# Altium PCB PCB1.PcbDoc
Units mm, origin at the board's own origin, x right, y up, seen from the top; angles counter-clockwise.
Board outline 35.1 x 17.5 mm, 2 copper layers (Top Layer, Bottom Layer); 14 components, 9 nets, 55 pads, 36 vias.
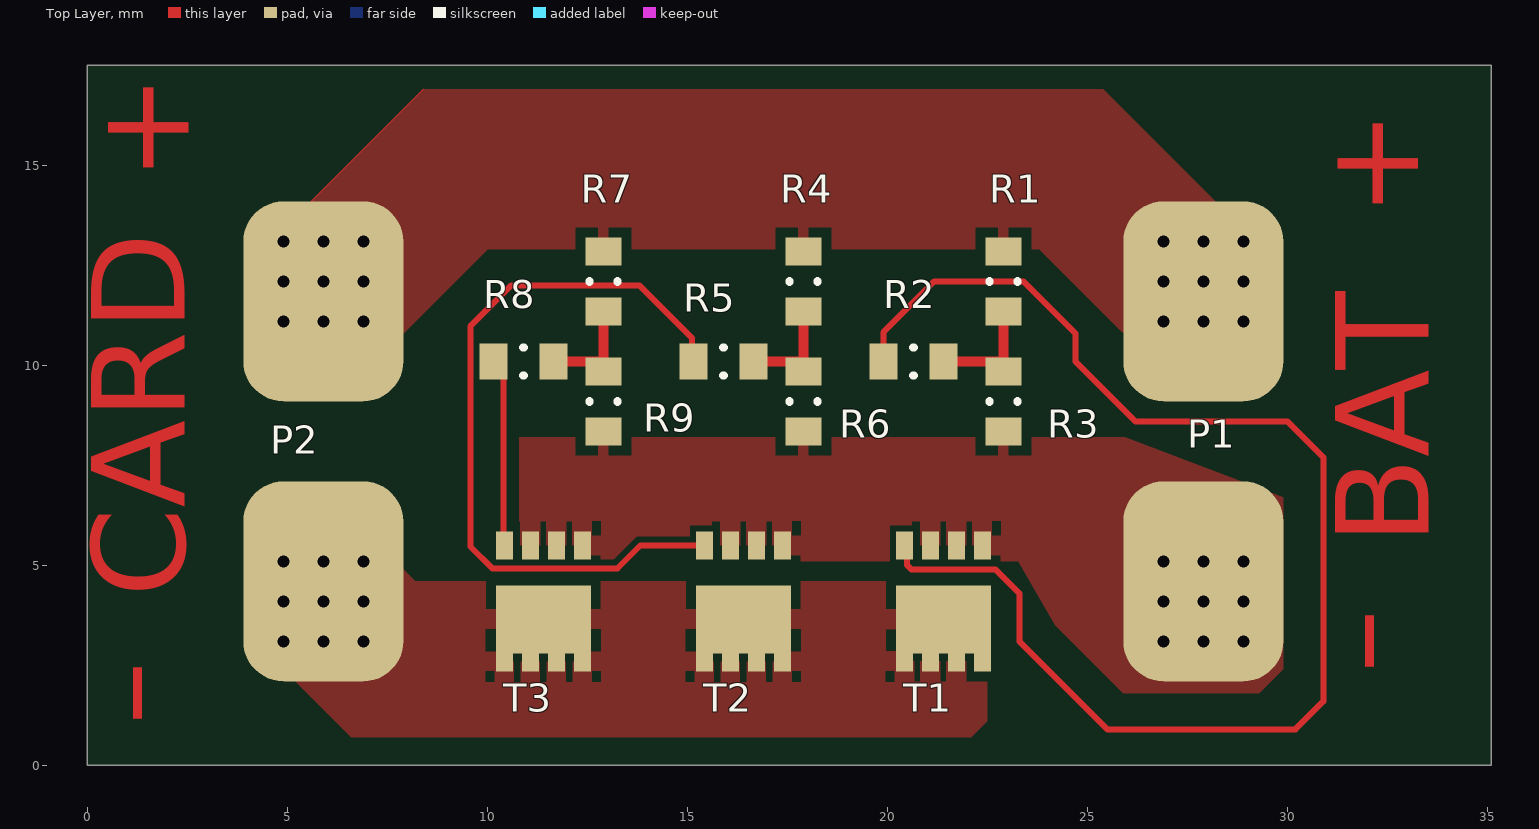
[diagram p0: Top Layer view]
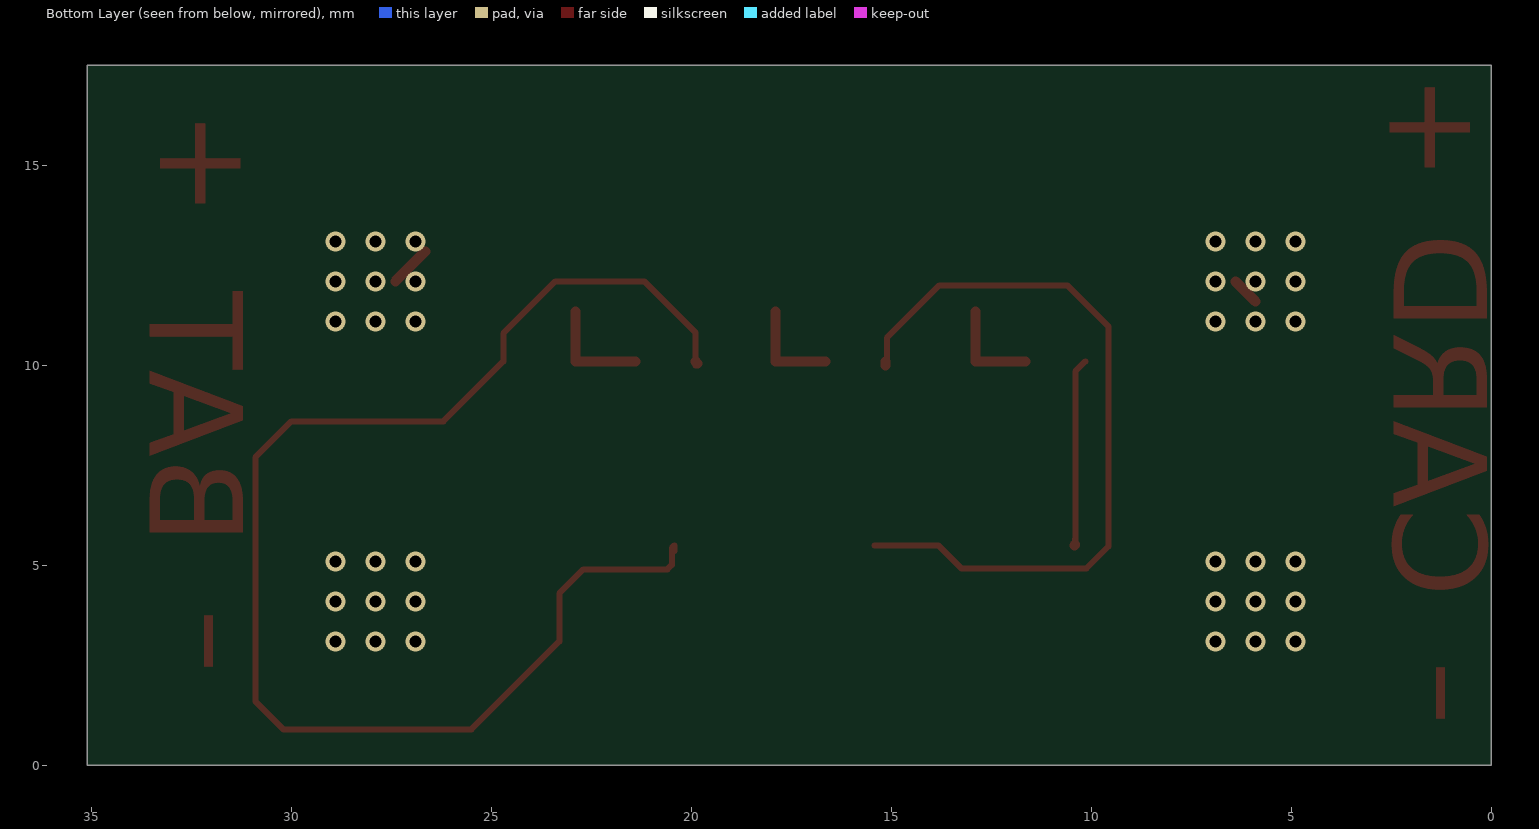
[diagram p1: Bottom Layer view, seen from below]

## Layer stack, top to bottom
Top Solder: solder mask 0.0102, Solder Resist, Dk 3.5
Top Layer: signal copper 0.0356
Dielectric1: dielectric 0.32, FR-4, Dk 4.8
Bottom Layer: signal copper 0.0356
Bottom Solder: solder mask 0.0102, Solder Resist, Dk 3.5

## Board outline
0,0 35.1,0 35.1,17.5 0,17.5

## Design rules (kind name [scope] priority, off if disabled: settings)
AcuteAngle [All] p1 off: minimum=8.80000000000000E+0001 checktracksonly=FALSE
Clearance Clearance_Normal [All] p1: gap=0.15 ignorepadtopadclearanceinfootprint=FALSE except(0: Arc-Hole Track-Hole SMDPad-Hole THPad-Hole Via-Hole Fill-Hole Poly-Hole Region-Hole Text-Hole)
ComponentClearance [All] p1: gap=0.2 collisioncheckmode=3 verticalgap=0.2 showdistances=FALSE
FabricationTestPointUsage TestPointUsage [All] p1: valid=0 allowmultiple=FALSE
FabricationTestpoint Testpoint [All] p1: side=3 testpointundercomponent=TRUE minsize=1.016 maxsize=2.54 preferedsize=1.524 minholesize=0 maxholesize=1.016 preferedholesize=0.813 testpointgrid=0.025 allowsidetop=TRUE allowsidebottom=TRUE usegrid=TRUE gridtolerance=0
Height [All] p1 off: minheight=0 maxheight=25.4 prefheight=12.7
HoleSize [All] p1: absolutevalues=TRUE maxlimit=6 minlimit=0.3 maxpercent=80.000 minpercent=20.000
MinimumAnnularRing [All] p1: minimumring=0.15
MinimumSolderMaskSliver [All] p1: minsoldermaskwidth=0.2
PlaneClearance [All] p1: clearance=0.4
PlaneConnect [All] p1: planeconnectstyle=Relief reliefexpansion=0.508 reliefentries=4 reliefconductorwidth=0.2 reliefairgap=0.254
PolygonConnect PolygonConnect_resistor [InNet('Bat+') Or InNet('Bat-') vs HasFootprint('RESC1608X06L')] p1: connectstyle=Relief reliefconductorwidth=0.254 reliefentries=4 polygonreliefangle="90 Angle" airgapwidth=0.254
PolygonConnect PolygonConnect_transistor [InNet('Bat- Card') Or InNet('Bat-') vs HasFootprint('PQFN8 3.3X3.3')] p2: connectstyle=Relief reliefconductorwidth=0.5 reliefentries=4 polygonreliefangle="90 Angle" airgapwidth=0.254
PolygonConnect PolygonConnect_Via [IsVia] p3: connectstyle=Direct reliefconductorwidth=0.254 reliefentries=4 polygonreliefangle="90 Angle" airgapwidth=0.254
PolygonConnect [All] p4: connectstyle=Direct reliefconductorwidth=0.2 reliefentries=4 polygonreliefangle="90 Angle" airgapwidth=0.254
RoutingCorners [All] p1: cornerstyle=45-Degree minsetback=1 maxsetback=2.54
RoutingVias [All] p1: holewidth=0.3 width=0.6 viastyle="Through Hole" minholewidth=0.3 minwidth=0.6 maxholewidth=1 maxwidth=4
SMDToCorner [All] p1 off: distance=78740
SMDToPlane [All] p1 off: distance=118110
SilkToSilkClearance [All] p1: silktosilkclearance=0.2
SilkToSolderMaskClearance SilkscreenOverComponentPads [IsPad] p1: minsilkscreentomaskgap=0.2 clearancetoexposedcopper=TRUE
SolderMaskExpansion SolderMaskExpansion_Via [isVia] p1: expansion=-5
SolderMaskExpansion [All] p2: expansion=0.05
ViasUnderSMD [All] p1: allowed=FALSE
Width [All] p1: maxlimit=5 minlimit=0.15 preferedwidth=0.2 minimp=50.000000 maximp=50.000000 favimp=50.000000
19 further rules are at their usual default settings.

## Components (designator, comment, footprint, x,y, rotation, side; value= is the part's Value field where it differs from the comment)
P1 "2 power pads" "PowerPads 2 pins" 27.9,4.1 r90 top
P2 "2 power pads" "PowerPads 2 pins" 5.9,12.1 r270 top
R1 "TBD" RESC1608X06L 22.9,12.1 r270 top
R2 "TBD" RESC1608X06L 20.65,10.1 r180 top
R3 "TBD" RESC1608X06L 22.9,9.1 r270 top
R4 "TBD" RESC1608X06L 17.9,12.1 r270 top
R5 "TBD" RESC1608X06L 15.9,10.1 r180 top
R6 "TBD" RESC1608X06L 17.9,9.1 r270 top
R7 "TBD" RESC1608X06L 12.9,12.1 r270 top
R8 "TBD" RESC1608X06L 10.9,10.1 r180 top
R9 "TBD" RESC1608X06L 12.9,9.1 r270 top
T1 "FDMC8010DC" "PQFN8 3.3X3.3" 21.4,4.1 r180 top
T2 "FDMC8010DC" "PQFN8 3.3X3.3" 16.4,4.1 r180 top
T3 "FDMC8010DC" "PQFN8 3.3X3.3" 11.4,4.1 r180 top

## Footprints (in the part's own frame and the unit in brackets; to place one, negate y for a bottom-side part, rotate by r counter-clockwise, add the part's x,y. Pads: shape width x height; smd on the part's side, far side on the other; paste and mask are expansions set on the pad)
"PowerPads 2 pins" [mm]
  rrect50% 5x4 smd paste-10: 1(0.5,0) 2(7.5,0)
"PQFN8 3.3X3.3" [mm]
  rect 0.42x0.7 smd: 1(-0.975,-1.4) 2(-0.325,-1.4) 3(0.325,-1.4) 4(0.975,-1.4)
  rect 0.42x0.5 smd: 5(0.975,1.5) 6(0.325,1.5) 7(-0.325,1.5) 8(-0.975,1.5)
  rect 0.7x1 smd: 9(-0.65,0.45) 9(0.65,0.45)
  rect 2.37x1.7 smd paste-10: 9(0,0.45)
  body extent -1.65,-1.65 1.65,1.65, height 0.8
RESC1608X06L [mm] "Chip Resistor, Body 1.6x0.8mm, IPC High Density, EIA 0603"
  rect 0.7x0.9 smd: 1(-0.75,0) 2(0.75,0)
  silkscreen extent -0.01,-0.35 0.01,0.35, body extent -0.85,-0.48 0.85,0.48, height 0.6

## Part data
P1 P2: "2-Pin", Manufacturer="Generic Components", Class I=Connector, Publisher="Altium Limited", Revision="July-2002: Re-released for DXP Platform."
R1 R2 R3 R4 R5 R6 R7 R8 R9: library part TBD[[/\]]0603[[/\]]1, "Resistor ToDo 0603", Currentie=CHF, DateLastUpdate="2012-11-19 / 14:13:33", Footprint Acort=0603, Preference=1, ROHS=True, Size=0603
T1 T2 T3: Manufacturer="ON Semiconductor / Fairchild", Max Operating Temperature=150°C, Min Operating Temperature=-55°C, Supplier Part Number 1=FDMC8010DCOSCT-ND, Element Configuration=Dual, Manufacturer Part Number=FDMC8010DC, Mount="Surface Mount", Pricing 1="1 = 1,29000, 10 = 1,15600, 100 = 0,90120, 500 = 0,74448, 1000 = 0,58774 (USD)", ROHS=No, Stock 1=36, Supplier 1=Digi-Key, Weight=0.039g

## Via types
v1: diameter 0.5, hole 0.3, Top Layer to Bottom Layer, 36 vias

## Nets (pads, with @x,y where several pads share a name; then routed paths per layer and width w, separated by ;. In a path a pad name is that pad's centre, name@x,y a point inside that pad or via, vN(x,y) a via of type N, cw(c..) or ccw(c..) an arc to the next point about the centre after c; other vN are vias at no path point)
Bat+: P1.2 P2.1 R1.1 R4.1 R7.1 | length 1.8
  Top Layer w0.254: P2.1 P2.1@6.4,12.1 ; P1.2@26.65,12.85 P1.2@27.4,12.1
  other v1: 4.9,11.1 5.9,11.1 6.9,11.1 26.9,11.1 27.9,11.1 28.9,11.1 4.9,12.1 5.9,12.1 6.9,12.1 26.9,12.1 27.9,12.1 28.9,12.1 4.9,13.1 5.9,13.1 6.9,13.1 26.9,13.1 27.9,13.1 28.9,13.1
Bat-: P1.1 R3.2 R6.2 R9.2 T1.1 T1.2 T1.3 T2.1 T2.2 T2.3 T3.1 T3.2 T3.3
  other v1: 26.9,3.1 27.9,3.1 28.9,3.1 26.9,4.1 27.9,4.1 28.9,4.1 26.9,5.1 27.9,5.1 28.9,5.1
"Bat- Card": P2.2 T1.5 T1.6 T1.7 T1.8 T1.9 T2.5 T2.6 T2.7 T2.8 T2.9 T3.5 T3.6 T3.7 T3.8 T3.9
  other v1: 4.9,3.1 5.9,3.1 6.9,3.1 4.9,4.1 5.9,4.1 6.9,4.1 4.9,5.1 5.9,5.1 6.9,5.1
NetR1_2: R1.2 R2.1 R3.1 | length 2.8
  Top Layer w0.254: R2.1 22.9,10.1 R1.2
NetR2_2: R2.2 T1.4 | length 34.5
  Top Layer w0.15: R2.2@19.9,10 R2.2 19.9,10.825 21.175,12.1 23.4,12.1 24.7,10.8 24.7,10.1 26.2,8.6 30,8.6 30.9,7.7 30.9,1.6 30.2,0.9 25.5,0.9 23.3,3.1 23.3,4.3 22.7,4.9 20.6,4.9 20.487,5.013 20.487,5.438 T1.4 T1.4@20.425,5.36
  Top Layer w0.254: R2.2@19.846,10.046 R2.2
NetR4_2: R4.2 R5.1 R6.1 | length 2.5
  Top Layer w0.254: R5.1 17.9,10.1 R4.2
NetR5_2: R5.2 T2.4 | length 19.1
  Top Layer w0.15: R5.2@15.15,10 15.113,10.037 15.113,10.687 13.8,12 10.6,12 9.575,10.975 9.575,5.472 10.122,4.925 13.253,4.925 13.828,5.5 T2.4
  Top Layer w0.254: R5.2@15.15,10 R5.2
NetR7_2: R7.2 R8.1 R9.1 | length 2.5
  Top Layer w0.254: R8.1 12.9,10.1 R7.2
NetR8_2: R8.2 T3.4 | length 4.9
  Top Layer w0.15: R8.2 10.4,9.85 T3.4@10.4,5.517 ; T3.4@10.408,5.517 T3.4@10.408,5.657
  Top Layer w0.254: T3.4@10.408,5.517 T3.4

## Polygon pours and split planes (outlines as drawn)
"Bat- Card" on Top Layer (solid, pour order 8): 7.9,4.925 7.9,4.9 8.2,4.6 22.5,4.6 22.5,1.1 22.1,0.7 6.6,0.7 5,2.3 5,4.925
Bat+ on Top Layer (solid, pour order 6): 5.6,14.1 8.4,16.9 25.4,16.9 28.3,14 28.3,10.825 25.875,10.825 23.8,12.9 10,12.9 10,12.887 7.713,10.6 5.6,10.6
no net on Top Layer (solid, pour order 4): 5.6,14.4
no net on Top Layer (solid, pour order 2): 5.6,14.1 8.4,16.9
Bat- on Top Layer "Top Layer-Bat-" (solid, pour order 0): 10.8,5.1 10.8,8.2 25.953,8.2 29.9,6.7 29.9,2.4 29.3,1.8 25.9,1.8 24.2,3.5 23.267,5.1

## Other copper
Top Layer:
  text "+" at 3.3,14.6 h4 r90
  text "+" at 34.035,13.7 h4 r90
  text "BAT" at 34.3,5.5 h4 r90
  text "CARD" at 3.2,4.2 h4 r90
  text "–" at 33.7,2.3 h4 r90
  text "–" at 2.9,1 h4 r90

## Silkscreen, mask and mechanical layers (free items; w line width, h text height)
Outline:
  the board outline again, w0.1

## Dimensions
0,0 to 0,17.5 on TopBody
0,0 to 35.1,0 on TopBody